# EAGLE board BRD File - Fine Motor Task Dispenser Design 29-Mar-23 (EAGLE 9.7.0)

Size 94.82 x 139.69 mm. Coordinates in mm from the lower left corner, seen from the top.
Outline: 0,0 94.82,0 94.82,139.69 0,139.69 0,0
Copper layers (1*16): Top 0.035mm / dielectric 1.5mm / Bottom 0.035mm
Design rules "default": minimum track width 6mil, minimum drill 0.35mm, track to track 6mil, track to pad 6mil, pad to pad 6mil, via to via 6mil, smd to smd 6mil, copper to edge 40mil, drill to drill 6mil, minimum pad ring 10mil, minimum via ring 8mil, stop-mask expansion 4mil, vias tented up to drill 0mil, thermal gap 10mil

## Footprints (pad centres in the part's own frame; a part is rotated, then mirrored left to right if it is on the bottom)
LEDRD254W60D565H860B_W = drill 0.981 pad 1.581: 1 -1.27,0; 2 1.27,0
LEDRD254W60D565H860B = drill 0.981 pad 1.581: 1 -1.27,0; 2 1.27,0
1X06 = drill 1.016 long: 1 -6.35,0; 2 -3.81,0; 3 -1.27,0; 4 1.27,0; 5 3.81,0; 6 6.35,0
SENRD254W50D503H320B = drill 0.7 pad 1.3: 1 -1.27,0; 2 1.27,0
RESAD1016W63L850D250B = drill 0.83 pad 1.43: 1 -5.08,0; 2 5.08,0
ARDUINO-UNO-R3-SHIELD = drill 1.016 pad 1.88: 3.3V 24.13,-2.54; 5V 24.13,0; A0 24.13,12.7; A1 24.13,15.24; A2 24.13,17.78; A3 24.13,20.32; A4 24.13,22.86; A5 24.13,25.4; AREF -24.13,-13.97; D2 -24.13,20.32; D3 -24.13,17.78; D4 -24.13,15.24; D5 -24.13,12.7; D6 -24.13,10.16; D7 -24.13,7.62; D8 -24.13,3.81; D9 -24.13,1.27; D10 -24.13,-1.27; D11 -24.13,-3.81; D12 -24.13,-6.35; D13 -24.13,-8.89; GND@0 24.13,2.54; GND@1 24.13,5.08; GND@2 -24.13,-11.43; IOREF 24.13,-7.62; NC 24.13,-10.16; RES 24.13,-5.08; RX -24.13,25.4; SCL -24.13,-19.05; SDA -24.13,-16.51; TX -24.13,22.86; VIN 24.13,7.62
DIP762W53P254L1969H508Q16B = drill 0.743 pad 1.343: 1 -3.81,8.89; 2 -3.81,6.35; 3 -3.81,3.81; 4 -3.81,1.27; 5 -3.81,-1.27; 6 -3.81,-3.81; 7 -3.81,-6.35; 8 -3.81,-8.89; 9 3.81,-8.89; 10 3.81,-6.35; 11 3.81,-3.81; 12 3.81,-1.27; 13 3.81,1.27; 14 3.81,3.81; 15 3.81,6.35; 16 3.81,8.89

## Placement (x,y rotation side)
DHOUSE_LIGHT  WHITE  [LEDRD254W60D565H860B_W]  78.52,131.2 180 top
DIR_DIODE  RED  [LEDRD254W60D565H860B]  83.69,131.34 180 top
MSTEPPER_MOTOR  PINHD-1X06_1X06M  [1X06]  21.69,129.5 0 top
QIR_PHOTOTRANSISTOR  PHOTOTRANSISTOR  [SENRD254W50D503H320B]  89.07,132.1 180 top
R1  250  [RESAD1016W63L850D250B]  79.92,123.78 90 top
R2  250  [RESAD1016W63L850D250B]  85,124.12 90 top
R3  100k  [RESAD1016W63L850D250B]  85.01,70.96 90 top
UARDUINO  ARDUINO-UNO-R3-SHIELD  [ARDUINO-UNO-R3-SHIELD]  47.88,29.84 270 top
UMOTOR_DRIVER  L293E  [DIP762W53P254L1969H508Q16B]  30.4,87.47 90 top

## Library data of the parts
DHOUSE_LIGHT = Tinkercad; CATEGORY: Opto-Electronic; SUB-CATEGORY: LED; VALUE: LED_WHITE
DIR_DIODE = Tinkercad; CATEGORY: Opto-Electronic; SUB-CATEGORY: LED; VALUE: LED_RED
MSTEPPER_MOTOR QIR_PHOTOTRANSISTOR R1-R3 UARDUINO UMOTOR_DRIVER = Tinkercad

## Nets
DHOUSE_LIGHT_A: DHOUSE_LIGHT.1 R1.2
DIR_DIODE_A: DIR_DIODE.1 R2.2
UARDUINO_5V: QIR_PHOTOTRANSISTOR.2 R2.1 UARDUINO.5V UMOTOR_DRIVER.1 UMOTOR_DRIVER.8 UMOTOR_DRIVER.9 UMOTOR_DRIVER.16
UARDUINO_D2: QIR_PHOTOTRANSISTOR.1 R3.2 UARDUINO.D2
UARDUINO_D9: MSTEPPER_MOTOR.3 UARDUINO.D9 UMOTOR_DRIVER.15
UARDUINO_D10: UARDUINO.D10 UMOTOR_DRIVER.10
UARDUINO_D11: UARDUINO.D11 UMOTOR_DRIVER.7
UARDUINO_D12: UARDUINO.D12 UMOTOR_DRIVER.2
UARDUINO_D13: R1.1 UARDUINO.D13
UARDUINO_GND: DHOUSE_LIGHT.2 DIR_DIODE.2 R3.1 UARDUINO.GND@0 UARDUINO.GND@1 UARDUINO.GND@2
UMOTOR_DRIVER_1Y: MSTEPPER_MOTOR.6 UMOTOR_DRIVER.3
UMOTOR_DRIVER_2Y: MSTEPPER_MOTOR.5 UMOTOR_DRIVER.6
UMOTOR_DRIVER_3Y: MSTEPPER_MOTOR.4 UMOTOR_DRIVER.11
UMOTOR_DRIVER_GND3: UMOTOR_DRIVER.4 UMOTOR_DRIVER.5 UMOTOR_DRIVER.12 UMOTOR_DRIVER.13

## Tracks (layer width: path | path; a pad name or v marks a point on that pad's centre or on a via)
DHOUSE_LIGHT_A  (1 unrouted)
DIR_DIODE_A  (1 unrouted)
UARDUINO_5V  (6 unrouted)
UARDUINO_D2  (2 unrouted)
UARDUINO_D9  (2 unrouted)
UARDUINO_D10  (1 unrouted)
UARDUINO_D11  (1 unrouted)
UARDUINO_D12  (1 unrouted)
UARDUINO_D13  (1 unrouted)
UARDUINO_GND  (5 unrouted)
UMOTOR_DRIVER_1Y  (1 unrouted)
UMOTOR_DRIVER_2Y  (1 unrouted)
UMOTOR_DRIVER_3Y  (1 unrouted)
UMOTOR_DRIVER_GND3  (3 unrouted)